# Altium PCB Led_Tree_Main .PcbDoc (part 2 of 2)
Units mm, origin at the board's own origin, x right, y up, seen from the top; angles counter-clockwise.
Board outline 150 x 150 mm, 2 copper layers (Top Layer, Bottom Layer); 89 components, 252 nets, 716 pads, 87 vias.
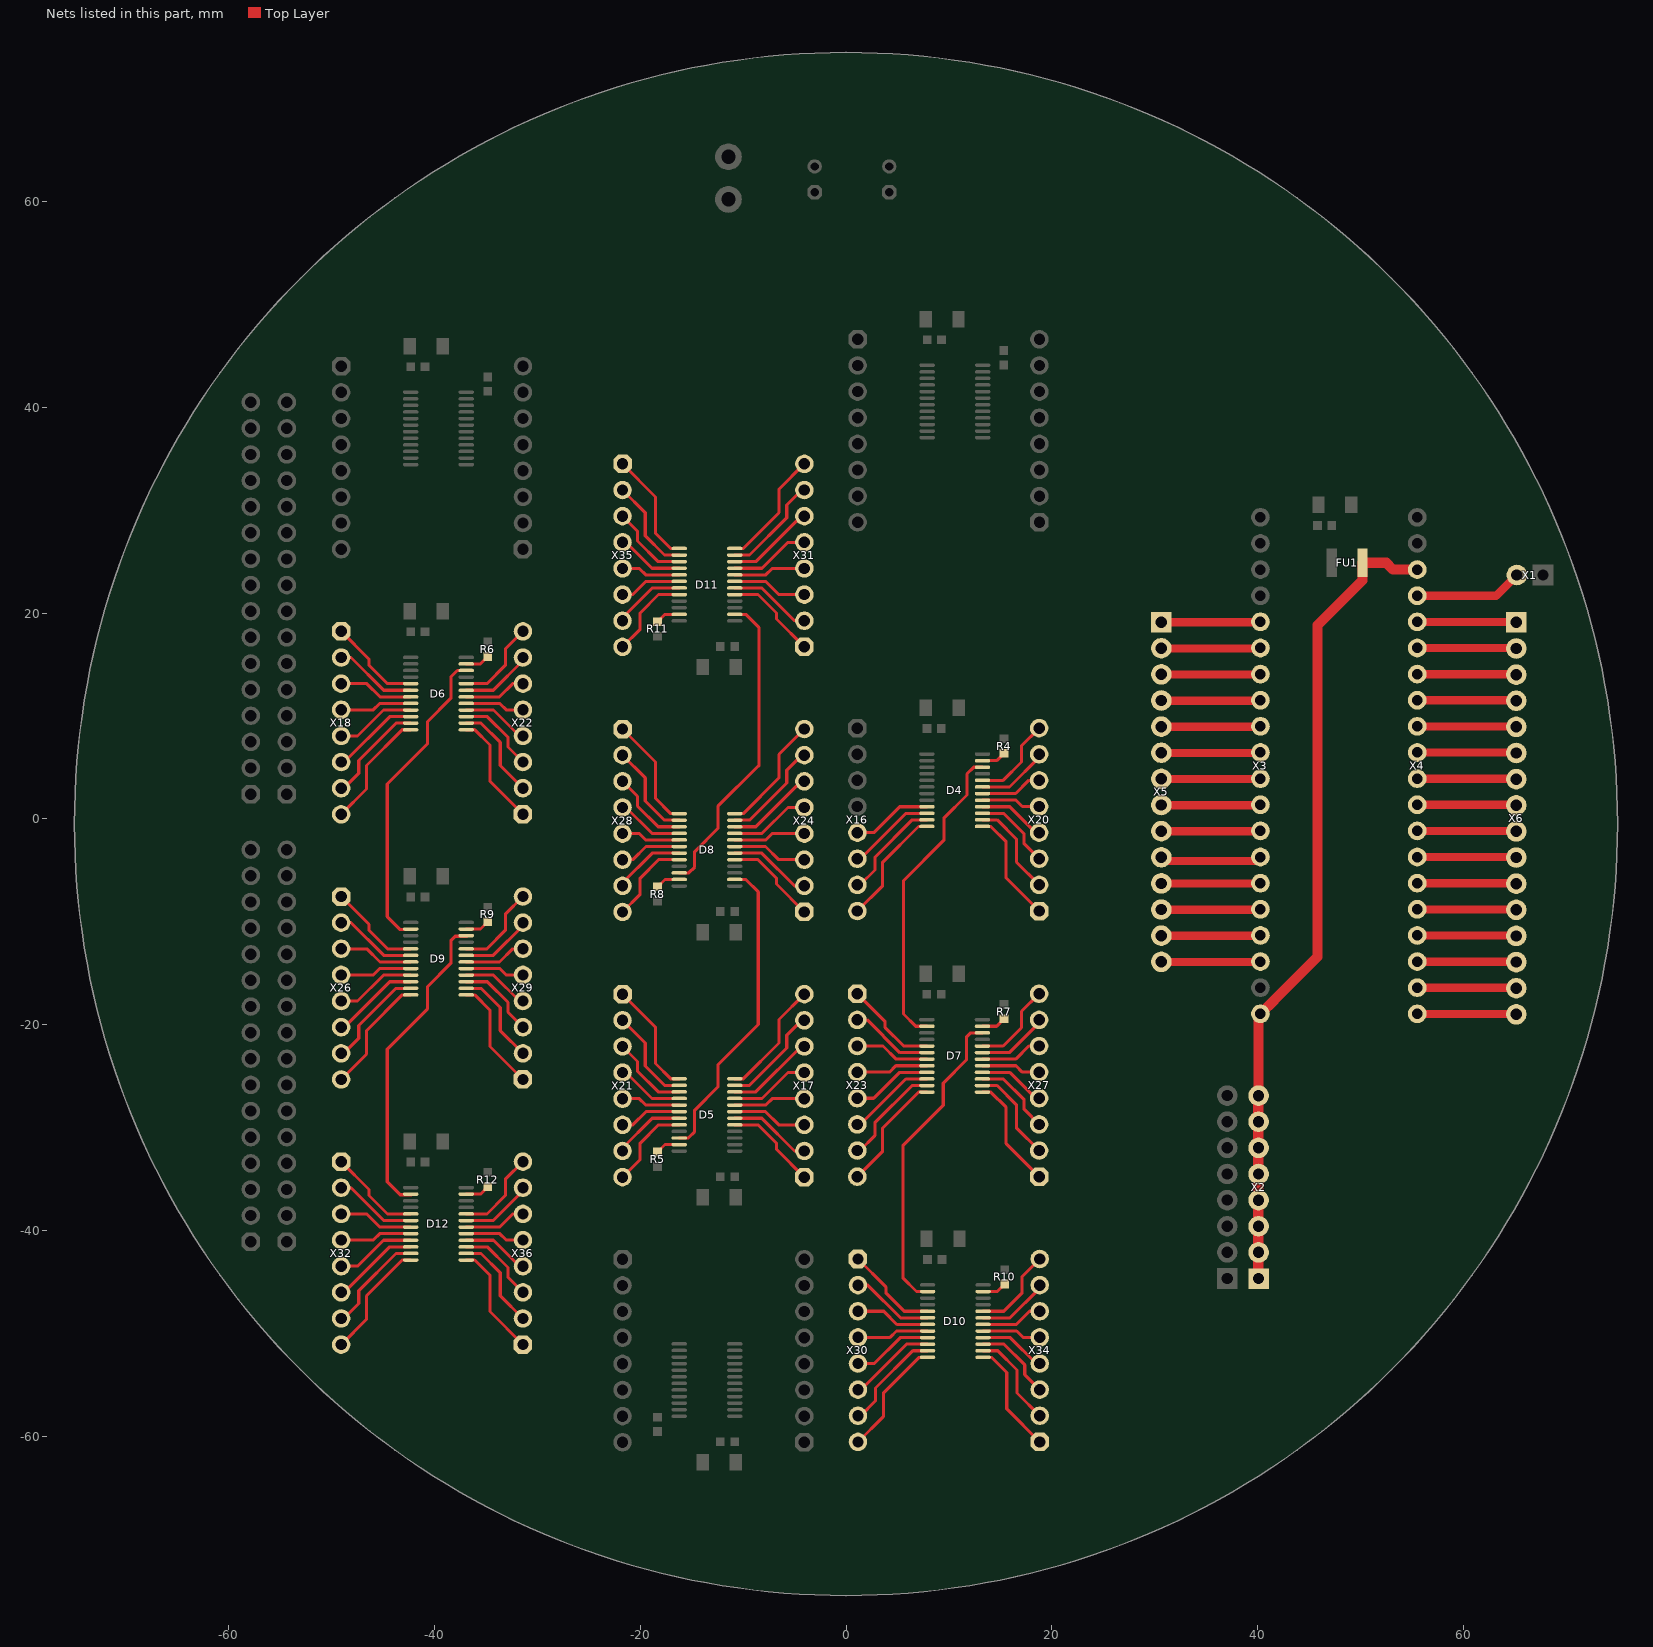
[diagram p2: the nets of this part, all layers, seen from the top]

## Via types
v1: diameter 1.27, hole 0.711, Top Layer to Bottom Layer, 82 vias
v2: diameter 5, hole 3, Top Layer to Bottom Layer, 4 vias
v3: diameter 4.68, hole 3.18, Top Layer to Bottom Layer, 1 vias

## Nets (pads, with @x,y where several pads share a name; then routed paths per layer and width w, separated by ;. In a path a pad name is that pad's centre, name@x,y a point inside that pad or via, vN(x,y) a via of type N, cw(c..) or ccw(c..) an arc to the next point about the centre after c; other vN are vias at no path point) (continued)
NetD4_9: D4.9 X16.5 | length 7.8
  Top Layer w0.3: X16.5@1.105,-1.34 2.695,-1.34 5.215,1.18 D4.9@7.865,1.18
NetD4_10: D4.10 X16.6 | length 8.3
  Top Layer w0.3: X16.6@1.405,-3.88 5.825,0.54 D4.10@7.865,0.54
NetD4_11: D4.11 X16.7 | length 9.9
  Top Layer w0.3: X16.7@1.365,-6.42 2.815,-4.97 2.815,-3.72 6.435,-0.1 D4.11@7.865,-0.1
NetD4_12: D4.12 X16.8 | length 11.5
  Top Layer w0.3: X16.8@1.105,-8.96 3.565,-6.5 3.565,-4.22 7.045,-0.74 D4.12@7.865,-0.74
NetD4_13: D4.13 X20.1 | length 11
  Top Layer w0.3: D4.13@13.265,-0.74 14.085,-0.74 15.565,-2.22 15.565,-5.75 X20.1@18.775,-8.96
NetD4_14: D4.14 X20.2 | length 9.4
  Top Layer w0.3: D4.14@13.265,-0.1 14.695,-0.1 16.565,-1.97 16.565,-4.21 X20.2@18.775,-6.42
NetD4_15: D4.15 X20.3 | length 7.9
  Top Layer w0.3: D4.15@13.265,0.54 15.305,0.54 17.315,-1.47 17.315,-2.42 X20.3@18.775,-3.88
NetD4_16: D4.16 X20.4 | length 6.2
  Top Layer w0.3: D4.16@13.265,1.18 15.915,1.18 X20.4@18.435,-1.34
NetD4_17: D4.17 X20.5 | length 5.8
  Top Layer w0.3: D4.17@13.265,1.82 16.525,1.82 17.145,1.2 X20.5@18.775,1.2
NetD4_18: D4.18 X20.6 | length 6
  Top Layer w0.3: D4.18@13.265,2.46 16.495,2.46 17.775,3.74 X20.6@18.775,3.74
NetD4_19: D4.19 X20.7 | length 6.7
  Top Layer w0.3: D4.19@13.265,3.1 15.885,3.1 X20.7@18.775,5.99
NetD4_20: D4.20 X20.8 | length 8.5
  Top Layer w0.3: D4.20@13.265,3.74 15.275,3.74 17.065,5.53 17.065,7.11 X20.8@18.775,8.82
NetD4_22: D4.22 D7.2 | length 30.4
  Top Layer w0.3: D7.2@7.86,-20.16 6.781,-20.16 5.585,-18.964 5.585,-6.01 9.515,-2.08 9.515,0.07 11.765,2.32 11.765,4.37 12.415,5.02 D4.22@13.265,5.02
NetD4_23: D4.23 R4.1 | length 2.4
  Top Layer w0.3: D4.23@13.265,5.66 14.645,5.66 R4.1@15.366,6.381
NetD5_5: D5.5 X17.1 | length 9.2
  Top Layer w0.3: D5.5@-10.81,-29.74 -8.55,-29.74 -6.76,-31.53 -6.76,-32.11 X17.1@-4.05,-34.82
NetD5_6: D5.6 X17.2 | length 8.1
  Top Layer w0.3: D5.6@-10.81,-29.1 -8.19,-29.1 -5.01,-32.28 X17.2@-4.05,-32.28
NetD5_7: D5.7 X17.3 | length 7.3
  Top Layer w0.3: D5.7@-10.81,-28.46 -7.83,-28.46 -6.55,-29.74 X17.3@-4.05,-29.74
NetD5_8: D5.8 X17.4 | length 7
  Top Layer w0.3: D5.8@-10.81,-27.82 -7.8,-27.82 -7.18,-27.2 X17.4@-4.05,-27.2
NetD5_9: D5.9 X17.5 | length 7.8
  Top Layer w0.3: D5.9@-10.81,-27.18 -8.16,-27.18 -5.64,-24.66 X17.5@-4.05,-24.66
NetD5_10: D5.10 X17.6 | length 8.3
  Top Layer w0.3: D5.10@-10.81,-26.54 -8.77,-26.54 X17.6@-4.35,-22.12
NetD5_11: D5.11 X17.7 | length 9.9
  Top Layer w0.3: D5.11@-10.81,-25.9 -9.38,-25.9 -5.76,-22.28 -5.76,-21.03 X17.7@-4.31,-19.58
NetD5_12: D5.12 X17.8 | length 11.5
  Top Layer w0.3: D5.12@-10.81,-25.26 -9.99,-25.26 -6.51,-21.78 -6.51,-19.5 X17.8@-4.05,-17.04
NetD5_13: D5.13 X21.1 | length 11
  Top Layer w0.3: X21.1@-21.72,-17.04 -18.51,-20.25 -18.51,-23.78 -17.03,-25.26 D5.13@-16.21,-25.26
NetD5_14: D5.14 X21.2 | length 9.4
  Top Layer w0.3: X21.2@-21.72,-19.58 -19.51,-21.79 -19.51,-24.03 -17.64,-25.9 D5.14@-16.21,-25.9
NetD5_15: D5.15 X21.3 | length 7.9
  Top Layer w0.3: X21.3@-21.72,-22.12 -20.26,-23.58 -20.26,-24.53 -18.25,-26.54 D5.15@-16.21,-26.54
NetD5_16: D5.16 X21.4 | length 6.2
  Top Layer w0.3: X21.4@-21.38,-24.66 -18.86,-27.18 D5.16@-16.21,-27.18
NetD5_17: D5.17 X21.5 | length 5.8
  Top Layer w0.3: X21.5@-21.72,-27.2 -20.09,-27.2 -19.47,-27.82 D5.17@-16.21,-27.82
NetD5_18: D5.18 X21.6 | length 6
  Top Layer w0.3: X21.6@-21.72,-29.74 -20.72,-29.74 -19.44,-28.46 D5.18@-16.21,-28.46
NetD5_19: D5.19 X21.7 | length 6.7
  Top Layer w0.3: X21.7@-21.72,-31.99 -18.83,-29.1 D5.19@-16.21,-29.1
NetD5_20: D5.20 X21.8 | length 8.5
  Top Layer w0.3: X21.8@-21.72,-34.82 -20.01,-33.11 -20.01,-31.53 -18.22,-29.74 D5.20@-16.21,-29.74
NetD5_22: D5.22 D8.2 | length 30.4
  Top Layer w0.3: D5.22@-16.21,-31.02 -15.327,-31.02 -14.71,-30.403 -14.71,-28.32 -12.46,-26.07 -12.46,-23.92 -8.53,-19.99 -8.53,-7.091 -9.731,-5.89 D8.2@-10.81,-5.89
NetD5_23: D5.23 R5.1 | length 2.4
  Top Layer w0.3: R5.1@-18.311,-32.381 -17.59,-31.66 D5.23@-16.21,-31.66
NetD6_5: D6.5 X18.1 | length 9.2
  Top Layer w0.3: X18.1@-49.07,18.22 -46.36,15.51 -46.36,14.93 -44.57,13.14 D6.5@-42.31,13.14
NetD6_6: D6.6 X18.2 | length 8.1
  Top Layer w0.3: X18.2@-49.07,15.68 -48.11,15.68 -44.93,12.5 D6.6@-42.31,12.5
NetD6_7: D6.7 X18.3 | length 7.3
  Top Layer w0.3: X18.3@-49.07,13.14 -46.57,13.14 -45.29,11.86 D6.7@-42.31,11.86
NetD6_8: D6.8 X18.4 | length 7
  Top Layer w0.3: X18.4@-49.07,10.6 -45.94,10.6 -45.32,11.22 D6.8@-42.31,11.22
NetD6_9: D6.9 X18.5 | length 7.8
  Top Layer w0.3: X18.5@-49.07,8.06 -47.48,8.06 -44.96,10.58 D6.9@-42.31,10.58
NetD6_10: D6.10 X18.6 | length 8.3
  Top Layer w0.3: X18.6@-48.77,5.52 -44.35,9.94 D6.10@-42.31,9.94
NetD6_11: D6.11 X18.7 | length 9.9
  Top Layer w0.3: X18.7@-48.81,2.98 -47.36,4.43 -47.36,5.68 -43.74,9.3 D6.11@-42.31,9.3
NetD6_12: D6.12 X18.8 | length 11.5
  Top Layer w0.3: X18.8@-49.07,0.44 -46.61,2.9 -46.61,5.18 -43.13,8.66 D6.12@-42.31,8.66
NetD6_13: D6.13 X22.1 | length 11
  Top Layer w0.3: D6.13@-36.91,8.66 -36.09,8.66 -34.61,7.18 -34.61,3.65 X22.1@-31.4,0.44
NetD6_14: D6.14 X22.2 | length 9.4
  Top Layer w0.3: D6.14@-36.91,9.3 -35.48,9.3 -33.61,7.43 -33.61,5.19 X22.2@-31.4,2.98
NetD6_15: D6.15 X22.3 | length 7.9
  Top Layer w0.3: D6.15@-36.91,9.94 -34.87,9.94 -32.86,7.93 -32.86,6.98 X22.3@-31.4,5.52
NetD6_16: D6.16 X22.4 | length 6.2
  Top Layer w0.3: D6.16@-36.91,10.58 -34.26,10.58 X22.4@-31.74,8.06
NetD6_17: D6.17 X22.5 | length 5.8
  Top Layer w0.3: D6.17@-36.91,11.22 -33.65,11.22 -33.03,10.6 X22.5@-31.4,10.6
NetD6_18: D6.18 X22.6 | length 6
  Top Layer w0.3: D6.18@-36.91,11.86 -33.68,11.86 -32.4,13.14 X22.6@-31.4,13.14
NetD6_19: D6.19 X22.7 | length 6.7
  Top Layer w0.3: D6.19@-36.91,12.5 -34.29,12.5 X22.7@-31.4,15.39
NetD6_20: D6.20 X22.8 | length 8.5
  Top Layer w0.3: D6.20@-36.91,13.14 -34.9,13.14 -33.11,14.93 -33.11,16.51 X22.8@-31.4,18.22
NetD6_22: D6.22 D9.2 | length 30.5
  Top Layer w0.3: D9.2@-42.25,-10.77 -43.329,-10.77 -44.59,-9.509 -44.59,3.39 -40.66,7.32 -40.66,9.47 -38.41,11.72 -38.41,13.791 -37.781,14.42 D6.22@-36.91,14.42
NetD6_23: D6.23 R6.1 | length 2.4
  Top Layer w0.3: D6.23@-36.91,15.06 -35.53,15.06 R6.1@-34.809,15.781
NetD7_5: D7.5 X23.1 | length 9.2
  Top Layer w0.3: X23.1@1.1,-17 3.81,-19.71 3.81,-20.29 5.6,-22.08 D7.5@7.86,-22.08
NetD7_6: D7.6 X23.2 | length 8.1
  Top Layer w0.3: X23.2@1.1,-19.54 2.06,-19.54 5.24,-22.72 D7.6@7.86,-22.72
NetD7_7: D7.7 X23.3 | length 7.3
  Top Layer w0.3: X23.3@1.1,-22.08 3.6,-22.08 4.88,-23.36 D7.7@7.86,-23.36
NetD7_8: D7.8 X23.4 | length 7
  Top Layer w0.3: X23.4@1.1,-24.62 4.23,-24.62 4.85,-24 D7.8@7.86,-24
NetD7_9: D7.9 X23.5 | length 7.8
  Top Layer w0.3: X23.5@1.1,-27.16 2.69,-27.16 5.21,-24.64 D7.9@7.86,-24.64
NetD7_10: D7.10 X23.6 | length 8.3
  Top Layer w0.3: X23.6@1.4,-29.7 5.82,-25.28 D7.10@7.86,-25.28
NetD7_11: D7.11 X23.7 | length 9.9
  Top Layer w0.3: X23.7@1.36,-32.24 2.81,-30.79 2.81,-29.54 6.43,-25.92 D7.11@7.86,-25.92
NetD7_12: D7.12 X23.8 | length 11.5
  Top Layer w0.3: X23.8@1.1,-34.78 3.56,-32.32 3.56,-30.04 7.04,-26.56 D7.12@7.86,-26.56
NetD7_13: D7.13 X27.1 | length 11
  Top Layer w0.3: D7.13@13.26,-26.56 14.08,-26.56 15.56,-28.04 15.56,-31.57 X27.1@18.77,-34.78
NetD7_14: D7.14 X27.2 | length 9.4
  Top Layer w0.3: D7.14@13.26,-25.92 14.69,-25.92 16.56,-27.79 16.56,-30.03 X27.2@18.77,-32.24
NetD7_15: D7.15 X27.3 | length 7.9
  Top Layer w0.3: D7.15@13.26,-25.28 15.3,-25.28 17.31,-27.29 17.31,-28.24 X27.3@18.77,-29.7
NetD7_16: D7.16 X27.4 | length 6.2
  Top Layer w0.3: D7.16@13.26,-24.64 15.91,-24.64 X27.4@18.43,-27.16
NetD7_17: D7.17 X27.5 | length 5.8
  Top Layer w0.3: D7.17@13.26,-24 16.52,-24 17.14,-24.62 X27.5@18.77,-24.62
NetD7_18: D7.18 X27.6 | length 6
  Top Layer w0.3: D7.18@13.26,-23.36 16.49,-23.36 17.77,-22.08 X27.6@18.77,-22.08
NetD7_19: D7.19 X27.7 | length 6.7
  Top Layer w0.3: D7.19@13.26,-22.72 15.88,-22.72 X27.7@18.77,-19.83
NetD7_20: D7.20 X27.8 | length 8.5
  Top Layer w0.3: D7.20@13.26,-22.08 15.27,-22.08 17.06,-20.29 17.06,-18.71 X27.8@18.77,-17
NetD7_22: D7.22 D10.2 | length 30.6
  Top Layer w0.3: D10.2@7.925,-45.94 6.846,-45.94 5.52,-44.614 5.52,-31.77 9.45,-27.84 9.45,-25.69 11.7,-23.44 11.7,-21.225 12.125,-20.8 D7.22@13.26,-20.8
NetD7_23: D7.23 R7.1 | length 2.4
  Top Layer w0.3: D7.23@13.26,-20.16 14.64,-20.16 R7.1@15.361,-19.439
NetD8_5: D8.5 X24.1 | length 9.2
  Top Layer w0.3: D8.5@-10.81,-3.97 -8.55,-3.97 -6.76,-5.76 -6.76,-6.34 X24.1@-4.05,-9.05
NetD8_6: D8.6 X24.2 | length 8.1
  Top Layer w0.3: D8.6@-10.81,-3.33 -8.19,-3.33 -5.01,-6.51 X24.2@-4.05,-6.51
NetD8_7: D8.7 X24.3 | length 7.3
  Top Layer w0.3: D8.7@-10.81,-2.69 -7.83,-2.69 -6.55,-3.97 X24.3@-4.05,-3.97
NetD8_8: D8.8 X24.4 | length 7
  Top Layer w0.3: D8.8@-10.81,-2.05 -7.8,-2.05 -7.18,-1.43 X24.4@-4.05,-1.43
NetD8_9: D8.9 X24.5 | length 7.8
  Top Layer w0.3: D8.9@-10.81,-1.41 -8.16,-1.41 -5.64,1.11 X24.5@-4.05,1.11
NetD8_10: D8.10 X24.6 | length 8.3
  Top Layer w0.3: D8.10@-10.81,-0.77 -8.77,-0.77 X24.6@-4.35,3.65
NetD8_11: D8.11 X24.7 | length 9.9
  Top Layer w0.3: D8.11@-10.81,-0.13 -9.38,-0.13 -5.76,3.49 -5.76,4.74 X24.7@-4.31,6.19
NetD8_12: D8.12 X24.8 | length 11.5
  Top Layer w0.3: D8.12@-10.81,0.51 -9.99,0.51 -6.51,3.99 -6.51,6.27 X24.8@-4.05,8.73
NetD8_13: D8.13 X28.1 | length 11
  Top Layer w0.3: X28.1@-21.72,8.73 -18.51,5.52 -18.51,1.99 -17.03,0.51 D8.13@-16.21,0.51
NetD8_14: D8.14 X28.2 | length 9.4
  Top Layer w0.3: X28.2@-21.72,6.19 -19.51,3.98 -19.51,1.74 -17.64,-0.13 D8.14@-16.21,-0.13
NetD8_15: D8.15 X28.3 | length 7.9
  Top Layer w0.3: X28.3@-21.72,3.65 -20.26,2.19 -20.26,1.24 -18.25,-0.77 D8.15@-16.21,-0.77
NetD8_16: D8.16 X28.4 | length 6.2
  Top Layer w0.3: X28.4@-21.38,1.11 -18.86,-1.41 D8.16@-16.21,-1.41
NetD8_17: D8.17 X28.5 | length 5.8
  Top Layer w0.3: X28.5@-21.72,-1.43 -20.09,-1.43 -19.47,-2.05 D8.17@-16.21,-2.05
NetD8_18: D8.18 X28.6 | length 6
  Top Layer w0.3: X28.6@-21.72,-3.97 -20.72,-3.97 -19.44,-2.69 D8.18@-16.21,-2.69
NetD8_19: D8.19 X28.7 | length 6.7
  Top Layer w0.3: X28.7@-21.72,-6.22 -18.83,-3.33 D8.19@-16.21,-3.33
NetD8_20: D8.20 X28.8 | length 8.5
  Top Layer w0.3: X28.8@-21.72,-9.05 -20.01,-7.34 -20.01,-5.76 -18.22,-3.97 D8.20@-16.21,-3.97
NetD8_22: D8.22 D11.2 | length 30.5
  Top Layer w0.3: D8.22@-16.21,-5.25 -15.27,-5.25 -14.71,-4.69 -14.71,-3.19 -12.46,-0.94 -12.46,1.21 -8.53,5.14 ; D11.2@-10.81,19.88 -9.731,19.88 -8.47,18.619 -8.47,5.14
NetD8_23: D8.23 R8.1 | length 2.4
  Top Layer w0.3: R8.1@-18.311,-6.611 -17.59,-5.89 D8.23@-16.21,-5.89
NetD9_5: D9.5 X26.1 | length 9.2
  Top Layer w0.3: X26.1@-49.07,-7.55 -46.36,-10.26 -46.36,-10.84 -44.57,-12.63 D9.5@-42.31,-12.63
NetD9_6: D9.6 X26.2 | length 8.1
  Top Layer w0.3: X26.2@-49.07,-10.09 -48.11,-10.09 -44.93,-13.27 D9.6@-42.31,-13.27
NetD9_7: D9.7 X26.3 | length 7.3
  Top Layer w0.3: X26.3@-49.07,-12.63 -46.57,-12.63 -45.29,-13.91 D9.7@-42.31,-13.91
NetD9_8: D9.8 X26.4 | length 7
  Top Layer w0.3: X26.4@-49.07,-15.17 -45.94,-15.17 -45.32,-14.55 D9.8@-42.31,-14.55
NetD9_9: D9.9 X26.5 | length 7.8
  Top Layer w0.3: X26.5@-49.07,-17.71 -47.48,-17.71 -44.96,-15.19 D9.9@-42.31,-15.19
NetD9_10: D9.10 X26.6 | length 8.3
  Top Layer w0.3: X26.6@-48.77,-20.25 -44.35,-15.83 D9.10@-42.31,-15.83
NetD9_11: D9.11 X26.7 | length 9.9
  Top Layer w0.3: X26.7@-48.81,-22.79 -47.36,-21.34 -47.36,-20.09 -43.74,-16.47 D9.11@-42.31,-16.47
NetD9_12: D9.12 X26.8 | length 11.5
  Top Layer w0.3: X26.8@-49.07,-25.33 -46.61,-22.87 -46.61,-20.59 -43.13,-17.11 D9.12@-42.31,-17.11
NetD9_13: D9.13 X29.1 | length 11
  Top Layer w0.3: D9.13@-36.91,-17.11 -36.09,-17.11 -34.61,-18.59 -34.61,-22.12 X29.1@-31.4,-25.33
NetD9_14: D9.14 X29.2 | length 9.4
  Top Layer w0.3: D9.14@-36.91,-16.47 -35.48,-16.47 -33.61,-18.34 -33.61,-20.58 X29.2@-31.4,-22.79
NetD9_15: D9.15 X29.3 | length 7.9
  Top Layer w0.3: D9.15@-36.91,-15.83 -34.87,-15.83 -32.86,-17.84 -32.86,-18.79 X29.3@-31.4,-20.25
NetD9_16: D9.16 X29.4 | length 6.2
  Top Layer w0.3: D9.16@-36.91,-15.19 -34.26,-15.19 X29.4@-31.74,-17.71
NetD9_17: D9.17 X29.5 | length 5.8
  Top Layer w0.3: D9.17@-36.91,-14.55 -33.65,-14.55 -33.03,-15.17 X29.5@-31.4,-15.17
NetD9_18: D9.18 X29.6 | length 6
  Top Layer w0.3: D9.18@-36.91,-13.91 -33.68,-13.91 -32.4,-12.63 X29.6@-31.4,-12.63
NetD9_19: D9.19 X29.7 | length 6.7
  Top Layer w0.3: D9.19@-36.91,-13.27 -34.29,-13.27 X29.7@-31.4,-10.38
NetD9_20: D9.20 X29.8 | length 8.5
  Top Layer w0.3: D9.20@-36.91,-12.63 -34.9,-12.63 -33.11,-10.84 -33.11,-9.26 X29.8@-31.4,-7.55
NetD9_22: D9.22 D12.2 | length 30.6
  Top Layer w0.3: D12.2@-42.25,-36.54 -43.329,-36.54 -44.59,-35.279 -44.59,-22.38 -40.66,-18.45 -40.66,-16.3 -38.41,-14.05 -38.41,-11.835 -37.985,-11.41 D9.22@-36.85,-11.41
NetD9_23: D9.23 R9.1 | length 2.4
  Top Layer w0.3: D9.23@-36.91,-10.71 -35.53,-10.71 R9.1@-34.809,-9.989
NetD10_5: D10.5 X30.1 | length 9.2
  Top Layer w0.3: X30.1@1.165,-42.78 3.875,-45.49 3.875,-46.07 5.665,-47.86 D10.5@7.925,-47.86
NetD10_6: D10.6 X30.2 | length 8.1
  Top Layer w0.3: X30.2@1.165,-45.32 2.125,-45.32 5.305,-48.5 D10.6@7.925,-48.5
NetD10_7: D10.7 X30.3 | length 7.3
  Top Layer w0.3: X30.3@1.165,-47.86 3.665,-47.86 4.945,-49.14 D10.7@7.925,-49.14
NetD10_8: D10.8 X30.4 | length 7
  Top Layer w0.3: X30.4@1.165,-50.4 4.295,-50.4 4.915,-49.78 D10.8@7.925,-49.78
NetD10_9: D10.9 X30.5 | length 7.8
  Top Layer w0.3: X30.5@1.165,-52.94 2.755,-52.94 5.275,-50.42 D10.9@7.925,-50.42
NetD10_10: D10.10 X30.6 | length 8.3
  Top Layer w0.3: X30.6@1.465,-55.48 5.885,-51.06 D10.10@7.925,-51.06
NetD10_11: D10.11 X30.7 | length 9.9
  Top Layer w0.3: X30.7@1.425,-58.02 2.875,-56.57 2.875,-55.32 6.495,-51.7 D10.11@7.925,-51.7
NetD10_12: D10.12 X30.8 | length 11.5
  Top Layer w0.3: X30.8@1.165,-60.56 3.625,-58.1 3.625,-55.82 7.105,-52.34 D10.12@7.925,-52.34
NetD10_13: D10.13 X34.1 | length 11
  Top Layer w0.3: D10.13@13.325,-52.34 14.145,-52.34 15.625,-53.82 15.625,-57.35 X34.1@18.835,-60.56
NetD10_14: D10.14 X34.2 | length 9.4
  Top Layer w0.3: D10.14@13.325,-51.7 14.755,-51.7 16.625,-53.57 16.625,-55.81 X34.2@18.835,-58.02
NetD10_15: D10.15 X34.3 | length 7.9
  Top Layer w0.3: D10.15@13.325,-51.06 15.365,-51.06 17.375,-53.07 17.375,-54.02 X34.3@18.835,-55.48
NetD10_16: D10.16 X34.4 | length 6.2
  Top Layer w0.3: D10.16@13.325,-50.42 15.975,-50.42 X34.4@18.495,-52.94
NetD10_17: D10.17 X34.5 | length 5.8
  Top Layer w0.3: D10.17@13.325,-49.78 16.585,-49.78 17.205,-50.4 X34.5@18.835,-50.4
NetD10_18: D10.18 X34.6 | length 6
  Top Layer w0.3: D10.18@13.325,-49.14 16.555,-49.14 17.835,-47.86 X34.6@18.835,-47.86
NetD10_19: D10.19 X34.7 | length 6.7
  Top Layer w0.3: D10.19@13.325,-48.5 15.945,-48.5 X34.7@18.835,-45.61
NetD10_20: D10.20 X34.8 | length 8.5
  Top Layer w0.3: D10.20@13.325,-47.86 15.335,-47.86 17.125,-46.07 17.125,-44.49 X34.8@18.835,-42.78
NetD10_23: D10.23 R10.1 | length 2.4
  Top Layer w0.3: D10.23@13.325,-45.94 14.705,-45.94 R10.1@15.426,-45.219
NetD11_5: D11.5 X31.1 | length 9.2
  Top Layer w0.3: D11.5@-10.81,21.8 -8.55,21.8 -6.76,20.01 -6.76,19.43 X31.1@-4.05,16.72
NetD11_6: D11.6 X31.2 | length 8.1
  Top Layer w0.3: D11.6@-10.81,22.44 -8.19,22.44 -5.01,19.26 X31.2@-4.05,19.26
NetD11_7: D11.7 X31.3 | length 7.3
  Top Layer w0.3: D11.7@-10.81,23.08 -7.83,23.08 -6.55,21.8 X31.3@-4.05,21.8
NetD11_8: D11.8 X31.4 | length 7
  Top Layer w0.3: D11.8@-10.81,23.72 -7.8,23.72 -7.18,24.34 X31.4@-4.05,24.34
NetD11_9: D11.9 X31.5 | length 7.8
  Top Layer w0.3: D11.9@-10.81,24.36 -8.16,24.36 -5.64,26.88 X31.5@-4.05,26.88
NetD11_10: D11.10 X31.6 | length 8.3
  Top Layer w0.3: D11.10@-10.81,25 -8.77,25 X31.6@-4.35,29.42
NetD11_11: D11.11 X31.7 | length 9.9
  Top Layer w0.3: D11.11@-10.81,25.64 -9.38,25.64 -5.76,29.26 -5.76,30.51 X31.7@-4.31,31.96
NetD11_12: D11.12 X31.8 | length 11.5
  Top Layer w0.3: D11.12@-10.81,26.28 -9.99,26.28 -6.51,29.76 -6.51,32.04 X31.8@-4.05,34.5
NetD11_13: D11.13 X35.1 | length 11
  Top Layer w0.3: X35.1@-21.72,34.5 -18.51,31.29 -18.51,27.76 -17.03,26.28 D11.13@-16.21,26.28
NetD11_14: D11.14 X35.2 | length 9.4
  Top Layer w0.3: X35.2@-21.72,31.96 -19.51,29.75 -19.51,27.51 -17.64,25.64 D11.14@-16.21,25.64
NetD11_15: D11.15 X35.3 | length 7.9
  Top Layer w0.3: X35.3@-21.72,29.42 -20.26,27.96 -20.26,27.01 -18.25,25 D11.15@-16.21,25
NetD11_16: D11.16 X35.4 | length 6.2
  Top Layer w0.3: X35.4@-21.38,26.88 -18.86,24.36 D11.16@-16.21,24.36
NetD11_17: D11.17 X35.5 | length 5.8
  Top Layer w0.3: X35.5@-21.72,24.34 -20.09,24.34 -19.47,23.72 D11.17@-16.21,23.72
NetD11_18: D11.18 X35.6 | length 6
  Top Layer w0.3: X35.6@-21.72,21.8 -20.72,21.8 -19.44,23.08 D11.18@-16.21,23.08
NetD11_19: D11.19 X35.7 | length 6.7
  Top Layer w0.3: X35.7@-21.72,19.55 -18.83,22.44 D11.19@-16.21,22.44
NetD11_20: D11.20 X35.8 | length 8.5
  Top Layer w0.3: X35.8@-21.72,16.72 -20.01,18.43 -20.01,20.01 -18.22,21.8 D11.20@-16.21,21.8
NetD11_23: D11.23 R11.1 | length 2.4
  Top Layer w0.3: R11.1@-18.311,19.159 -17.59,19.88 D11.23@-16.21,19.88
NetD12_5: D12.5 X32.1 | length 9.2
  Top Layer w0.3: X32.1@-49.07,-33.32 -46.36,-36.03 -46.36,-36.61 -44.57,-38.4 D12.5@-42.31,-38.4
NetD12_6: D12.6 X32.2 | length 8.1
  Top Layer w0.3: X32.2@-49.07,-35.86 -48.11,-35.86 -44.93,-39.04 D12.6@-42.31,-39.04
NetD12_7: D12.7 X32.3 | length 7.3
  Top Layer w0.3: X32.3@-49.07,-38.4 -46.57,-38.4 -45.29,-39.68 D12.7@-42.31,-39.68
NetD12_8: D12.8 X32.4 | length 7
  Top Layer w0.3: X32.4@-49.07,-40.94 -45.94,-40.94 -45.32,-40.32 D12.8@-42.31,-40.32
NetD12_9: D12.9 X32.5 | length 7.8
  Top Layer w0.3: X32.5@-49.07,-43.48 -47.48,-43.48 -44.96,-40.96 D12.9@-42.31,-40.96
NetD12_10: D12.10 X32.6 | length 8.3
  Top Layer w0.3: X32.6@-48.77,-46.02 -44.35,-41.6 D12.10@-42.31,-41.6
NetD12_11: D12.11 X32.7 | length 9.9
  Top Layer w0.3: X32.7@-48.81,-48.56 -47.36,-47.11 -47.36,-45.86 -43.74,-42.24 D12.11@-42.31,-42.24
NetD12_12: D12.12 X32.8 | length 11.5
  Top Layer w0.3: X32.8@-49.07,-51.1 -46.61,-48.64 -46.61,-46.36 -43.13,-42.88 D12.12@-42.31,-42.88
NetD12_13: D12.13 X36.1 | length 11
  Top Layer w0.3: D12.13@-36.91,-42.88 -36.09,-42.88 -34.61,-44.36 -34.61,-47.89 X36.1@-31.4,-51.1
NetD12_14: D12.14 X36.2 | length 9.4
  Top Layer w0.3: D12.14@-36.91,-42.24 -35.48,-42.24 -33.61,-44.11 -33.61,-46.35 X36.2@-31.4,-48.56
NetD12_15: D12.15 X36.3 | length 7.9
  Top Layer w0.3: D12.15@-36.91,-41.6 -34.87,-41.6 -32.86,-43.61 -32.86,-44.56 X36.3@-31.4,-46.02
NetD12_16: D12.16 X36.4 | length 6.2
  Top Layer w0.3: D12.16@-36.91,-40.96 -34.26,-40.96 X36.4@-31.74,-43.48
NetD12_17: D12.17 X36.5 | length 5.8
  Top Layer w0.3: D12.17@-36.91,-40.32 -33.65,-40.32 -33.03,-40.94 X36.5@-31.4,-40.94
NetD12_18: D12.18 X36.6 | length 6
  Top Layer w0.3: D12.18@-36.91,-39.68 -33.68,-39.68 -32.4,-38.4 X36.6@-31.4,-38.4
NetD12_19: D12.19 X36.7 | length 6.7
  Top Layer w0.3: D12.19@-36.91,-39.04 -34.29,-39.04 X36.7@-31.4,-36.15
NetD12_20: D12.20 X36.8 | length 8.5
  Top Layer w0.3: D12.20@-36.91,-38.4 -34.9,-38.4 -33.11,-36.61 -33.11,-35.03 X36.8@-31.4,-33.32
NetD12_23: D12.23 R12.1 | length 2.4
  Top Layer w0.3: D12.23@-36.91,-36.48 -35.53,-36.48 R12.1@-34.809,-35.759
NetFU1_2: FU1.2 X2.1 X2.2 X2.3 X2.4 X2.5 X2.6 X2.7 X2.8 X3.20 X4.3 | length 79.9
  Top Layer w0.8: X2.8@40.15,-27.085 X2.8@40.15,-26.9
  Top Layer w1: X2.8@39.885,-26.735 X2.8@39.885,-26.635 ; X2.1@40.06,-44.775 40.06,-42.14 40.06,-37.06 40.06,-29.44 X2.8@40.06,-26.995 ; X2.8@40.15,-26.9 X2.8@39.885,-26.635 ; 41.677,-17.558 45.825,-13.41 45.825,18.825 50.2,23.2 FU1.2@50.2,24.9 52.5,24.9 53.17,24.23 X4.3@55.525,24.23 ; 41.683,-17.564 41.671,-17.564 X3.20@40.285,-18.95 40.1,-19.135 40.1,-26.42 X2.8@39.885,-26.635
NetX1_2: X1.2 X4.4 | length 10.5
  Top Layer w0.8: X4.4@55.525,21.69 63.19,21.69 ; 63.19,21.68 X1.2@65.21,23.7
NetX3_5: X3.5 X5.1 | length 9.7
  Top Layer w0.8: X5.1@30.65,19.11 40.245,19.11 X3.5@40.285,19.15
NetX3_6: X3.6 X5.2 | length 9.7
  Top Layer w0.8: X5.2@30.65,16.57 40.245,16.57 X3.6@40.285,16.61
NetX3_7: X3.7 X5.3 | length 9.7
  Top Layer w0.8: X5.3@30.65,14.03 40.245,14.03 X3.7@40.285,14.07
NetX3_8: X3.8 X5.4 | length 9.7
  Top Layer w0.8: X5.4@30.65,11.49 40.245,11.49 X3.8@40.285,11.53
NetX3_9: X3.9 X5.5 | length 9.7
  Top Layer w0.8: X5.5@30.65,8.95 40.245,8.95 X3.9@40.285,8.99
NetX3_10: X3.10 X5.6 | length 9.7
  Top Layer w0.8: X5.6@30.65,6.41 40.245,6.41 X3.10@40.285,6.45
NetX3_11: X3.11 X5.7 | length 9.7
  Top Layer w0.8: X5.7@30.65,3.87 40.245,3.87 X3.11@40.285,3.91
NetX3_12: X3.12 X5.8 | length 9.7
  Top Layer w0.8: X5.8@30.65,1.33 40.245,1.33 X3.12@40.285,1.37
NetX3_13: X3.13 X5.9 | length 9.7
  Top Layer w0.8: X5.9@30.65,-1.21 40.245,-1.21 X3.13@40.285,-1.17
NetX3_14: X3.14 X5.10 | length 9.9
  Top Layer w0.8: X5.10@30.65,-3.75 31,-4.1 39.895,-4.1 X3.14@40.285,-3.71
NetX3_15: X3.15 X5.11 | length 9.7
  Top Layer w0.8: X5.11@30.65,-6.29 40.245,-6.29 X3.15@40.285,-6.25
NetX3_16: X3.16 X5.12 | length 9.7
  Top Layer w0.8: X5.12@30.65,-8.83 40.245,-8.83 X3.16@40.285,-8.79
NetX3_17: X3.17 X5.13 | length 9.7
  Top Layer w0.8: X5.13@30.65,-11.37 40.245,-11.37 X3.17@40.285,-11.33
NetX3_18: X3.18 X5.14 | length 9.7
  Top Layer w0.8: X5.14@30.65,-13.91 40.245,-13.91 X3.18@40.285,-13.87
NetX4_5: X4.5 X6.1 | length 9.6
  Top Layer w0.8: X4.5@55.525,19.14 65.11,19.14 X6.1@65.15,19.1
NetX4_6: X4.6 X6.2 | length 9.6
  Top Layer w0.8: X4.6@55.525,16.6 65.11,16.6 X6.2@65.15,16.56
NetX4_7: X4.7 X6.3 | length 9.6
  Top Layer w0.8: X4.7@55.525,14.06 65.11,14.06 X6.3@65.15,14.02
NetX4_8: X4.8 X6.4 | length 9.6
  Top Layer w0.8: X4.8@55.525,11.52 65.11,11.52 X6.4@65.15,11.48
NetX4_9: X4.9 X6.5 | length 9.6
  Top Layer w0.8: X4.9@55.525,8.98 65.11,8.98 X6.5@65.15,8.94
NetX4_10: X4.10 X6.6 | length 9.7
  Top Layer w0.8: X4.10@55.475,6.44 65.11,6.44 X6.6@65.15,6.4
NetX4_11: X4.11 X6.7 | length 9.6
  Top Layer w0.8: X4.11@55.525,3.9 65.11,3.9 X6.7@65.15,3.86
NetX4_12: X4.12 X6.8 | length 9.6
  Top Layer w0.8: X4.12@55.525,1.36 65.11,1.36 X6.8@65.15,1.32
NetX4_13: X4.13 X6.9 | length 9.6
  Top Layer w0.8: X4.13@55.525,-1.18 65.11,-1.18 X6.9@65.15,-1.22
NetX4_14: X4.14 X6.10 | length 9.6
  Top Layer w0.8: X4.14@55.525,-3.72 65.11,-3.72 X6.10@65.15,-3.76
NetX4_15: X4.15 X6.11 | length 9.6
  Top Layer w0.8: X4.15@55.525,-6.26 65.11,-6.26 X6.11@65.15,-6.3
NetX4_16: X4.16 X6.12 | length 9.7
  Top Layer w0.8: X4.16@55.5,-8.8 65.11,-8.8 X6.12@65.15,-8.84
NetX4_17: X4.17 X6.13 | length 9.6
  Top Layer w0.8: X4.17@55.525,-11.34 65.11,-11.34 X6.13@65.15,-11.38
NetX4_18: X4.18 X6.14 | length 9.6
  Top Layer w0.8: X4.18@55.525,-13.88 65.11,-13.88 X6.14@65.15,-13.92
NetX4_19: X4.19 X6.15 | length 9.6
  Top Layer w0.8: X4.19@55.525,-16.42 65.11,-16.42 X6.15@65.15,-16.46
NetX4_20: X4.20 X6.16 | length 9.6
  Top Layer w0.8: X4.20@55.525,-18.96 65.11,-18.96 X6.16@65.15,-19
pads on no net: D1.21 D2.21 D3.21 D4.21 D5.21 D6.21 D7.21 D8.21 D9.21 D10.21 D11.21 D12.21 D12.22
copper on no net:
  other v2: -28.9,-58 28.9,-58 -28.9,58 28.9,58
  other v3: -11.425,68.55

## Polygon pours and split planes (outlines as drawn)
GND on Bottom Layer "GND" (solid, remove dead copper, pour order 24): 35,-75.5 -75,-75.5 -75,66 35,66
GND on Bottom Layer "Bottom Layer-No Net" (solid, pour order 22): 8,70.5 8,58 16.1,58 16.1,70.5
NetC1_1 on Top Layer "VCC" (solid, remove dead copper, pour order 26): 35,-75.5 -75,-75.5 -75,66 35,66
NetC1_1 on Top Layer "Bottom Layer-No Net" (solid, pour order 18): 4,62.4 7,62.4 9.6,59.8 9.6,57.9 4,57.9

## Keep-outs
Keep-Out Layer:
  circle w0.2: c0,-0.5 r75

## Other copper
Top Layer:
  rectangle net GND: 8.075,62.67 16.075,70.35

## Silkscreen, mask and mechanical layers (free items; w line width, h text height)
Top Overlay:
  lines w0.1: -60.3,-23.6 -60.3,-42.7 -59.8,-42.7 ; -60.3,-20.5 -60.3,-1.4 -59.8,-1.4 ; -60.3,19.9 -60.3,0.8 -59.8,0.8 ; -60.3,23 -60.3,42.1 -59.8,42.1 ; -52.4,-42.7 -51.9,-42.7 -51.9,-23.6 ; -52.4,-1.4 -51.9,-1.4 -51.9,-20.5 ; -52.4,0.8 -51.9,0.8 -51.9,19.9 ; -52.4,42.1 -51.9,42.1 -51.9,23 ; 24.85,-12.625 25.05,-12.625 30.015,-12.625 ; 24.85,-12.475 24.85,-10.075 ; 24.85,-12.425 24.85,-15.075 24.94,-15.165 30.015,-15.165 ; 24.85,-2.475 24.85,-7.545 ; 24.85,17.855 29.38,17.855 ; 24.865,10.235 30.015,10.235 ; 24.9,0.075 30.015,0.075 ; 26.85,-7.545 26.85,-2.465 ; 26.85,-5.005 30.015,-5.005 ; 26.85,12.775 26.85,17.855 ; 26.85,15.315 30.015,15.315 ; 29.38,20.395 24.92,20.395 24.85,20.325 24.85,12.775 ; 30.015,-10.085 24.86,-10.085 24.85,-10.075 ; 30.015,-7.545 24.85,-7.545 ; 30.015,-2.465 24.86,-2.465 24.85,-2.455 24.85,0.125 24.85,2.615 ; 30.015,2.615 24.85,2.615 ; 30.015,5.155 24.88,5.155 24.85,5.185 ; 30.015,7.695 24.88,7.695 24.85,7.725 ; 30.015,12.775 24.85,12.775 ; 34.31,-37.475 34.31,-45.975 34.81,-45.975 ; 34.31,-34.225 34.31,-25.725 34.81,-25.725 ; 42,-45.875 42.5,-45.875 42.5,-37.375 ; 42,-25.625 42.5,-25.625 42.5,-34.125 ; 65.785,-20.27 70.84,-20.27 70.88,-20.23 70.94,-20.17 70.94,20.3 70.87,20.37 68.95,20.37 ; 65.785,-17.73 70.94,-17.73 ; 65.785,-15.19 70.94,-15.19 ; 65.785,-12.65 68.925,-12.65 ; 65.785,-10.11 70.94,-10.11 ; 65.785,-7.57 70.94,-7.57 ; 65.785,-5.03 70.94,-5.03 ; 65.785,0.05 70.94,0.05 ; 65.785,2.59 68.86,2.59 ; 65.785,5.13 68.9,5.13 ; 65.785,7.67 68.87,7.67 ; 65.785,10.21 70.94,10.21 ; 65.785,12.75 68.925,12.75 ; 65.785,15.29 70.94,15.29 ; 65.785,17.83 68.95,17.83 ; 66.42,20.37 68.95,20.37 ; 68.95,-15.14 68.95,-10.11 ; 68.95,-4.98 68.95,0.1 68.95,10.26 68.95,15.29 68.95,20.37 ; 24.85,-10.075 24.85,-7.545 ; 24.85,2.615 24.85,5.185 ; 24.85,5.185 24.85,7.725 ; 24.85,7.725 24.85,12.775 ; 42.5,-23 42.5,-19 53.3,-19 53.3,-23 42.5,-23
  lines w0.6: -17.5,60 -15.5,60 ; -17.5,64.4 -15.5,64.4 ; -16.5,59 -16.5,61
  text "R1" at 3.1,46.2 h1.5
  text "R16" at 20.77,46.2 h1.5
  text "R2" at 3.1,43.66 h1.5
  text "R15" at 20.77,43.66 h1.5
  text "B1" at -47.1,43.58 h1.5
  text "B16" at -29.43,43.58 h1.5
  text "R14" at 20.87,41.29 h1.5
  text "R3" at 3.1,41.12 h1.5
  text "B2" at -47.1,41.04 h1.5
  text "B15" at -29.43,41.04 h1.5
  text "R4" at 3.1,38.58 h1.5
  text "R13" at 20.77,38.58 h1.5
  text "B3" at -47.1,38.5 h1.5
  text "B14" at -29.43,38.5 h1.5
  text "R5" at 3.1,36.04 h1.5
  text "R12" at 20.77,36.04 h1.5
  text "B4" at -47.1,35.96 h1.5
  text "B13" at -29.43,35.96 h1.5
  text "G64" at -25.33,34.08 h1.5
  text "G56" at -7.66,34.08 h1.5
  text "R6" at 3.1,33.5 h1.5
  text "R11" at 20.77,33.5 h1.5
  text "B5" at -47.1,33.42 h1.5
  text "B12" at -29.43,33.42 h1.5
  text "G63" at -25.33,31.54 h1.5
  text "G55" at -7.66,31.54 h1.5
  text "R7" at 3.1,30.96 h1.5
  text "R10" at 20.77,30.96 h1.5
  text "B6" at -47.1,30.88 h1.5
  text "B11" at -29.43,30.88 h1.5
  text "G62" at -25.33,29 h1.5
  text "G54" at -7.66,29 h1.5
  text "R8" at 3.1,28.42 h1.5
  text "R9" at 20.77,28.42 h1.5
  text "B7" at -47.1,28.34 h1.5
  text "B10" at -29.43,28.34 h1.5
  text "G61" at -25.33,26.46 h1.5
  text "G53" at -7.66,26.46 h1.5
  text "B8" at -47.1,25.8 h1.5
  text "B9" at -29.43,25.8 h1.5
  text "G60" at -25.33,23.92 h1.5
  text "G52" at -7.66,23.92 h1.5
  text "RESET" at 59.55,23.25 h1.8
  text "3V3" at -52.4,22.4 h1.8 r270
  text "G59" at -25.33,21.38 h1.5
  text "G51" at -7.66,21.38 h1.5
  text "3V3" at -59.8,20.5 h1.8 r90
  text "G58" at -25.33,18.84 h1.5
  text "G50" at -7.66,18.84 h1.5
  text "B11" at 66.9,18.75 h1.8
  text "A8" at 27.65,18.725 h1.8
  text "B17" at -47.1,17.81 h1.5
  text "B32" at -29.43,17.81 h1.5
  text "I2C1" at 70.4,16.75 h1.3 r90
  text "G57" at -25.33,16.3 h1.5
  text "G49" at -7.66,16.3 h1.5
  text "A9" at 27.65,16.125 h1.8
  text "B10" at 66.9,16 h1.8
  text "B18" at -47.1,15.27 h1.5
  text "B31" at -29.43,15.27 h1.5
  text "A10" at 27.05,13.525 h1.8
  text "B1" at 66.9,13.46 h1.8
  text "USART1" at 26.25,13.125 h1.3 r90
  text "B19" at -47.1,12.73 h1.5
  text "B30" at -29.43,12.73 h1.5
  text "ADC12" at 70.4,11 h1.3 r90
  text "A11" at 27.05,10.985 h1.8
  text "B0" at 66.9,10.92 h1.8
  text "B20" at -47.1,10.19 h1.5
  text "B29" at -29.43,10.19 h1.5
  text "A12" at 27.05,8.445 h1.8
  text "R17" at 3.075,8.41 h1.5
  text "R32" at 20.745,8.41 h1.5
  text "A7" at 66.9,8.38 h1.8
  text "G41" at -25.36,8.31 h1.5
  text "G40" at -7.66,8.31 h1.5
  text "B21" at -47.1,7.65 h1.5
  text "B28" at -29.43,7.65 h1.5
  text "JTDI" at 26.65,5.925 h1.8
  text "R18" at 3.075,5.87 h1.5
  text "R31" at 20.745,5.87 h1.5
  text "A6" at 66.9,5.84 h1.8
  text "G42" at -25.36,5.77 h1.5
  text "G39" at -7.66,5.77 h1.5
  text "B22" at -47.1,5.11 h1.5
  text "B27" at -29.43,5.11 h1.5
  text "SPI1" at 70.4,3.75 h1.3 r90
  text "R19" at 3.075,3.33 h1.5
  text "R30" at 20.745,3.33 h1.5
  text "JTDO" at 26.25,3.325 h1.8
  text "A5" at 66.9,3.3 h1.8
  text "G43" at -25.36,3.23 h1.5
  text "G38" at -7.66,3.23 h1.5
  text "B23" at -47.1,2.57 h1.5
  text "B26" at -29.43,2.57 h1.5
  text "JNTRST" at 25.21,0.925 h1.6
  text "R20" at 3.075,0.79 h1.5
  text "R29" at 20.745,0.79 h1.5
  text "A4" at 66.9,0.76 h1.8
  text "G44" at -25.36,0.69 h1.5
  text "G37" at -7.66,0.69 h1.5
  text "B24" at -47.1,0.03 h1.5
  text "B25" at -29.43,0.03 h1.5
  text "B5" at 27.65,-1.595 h1.8
  text "R21" at 3.075,-1.75 h1.5
  text "R28" at 20.745,-1.75 h1.5
  text "A3" at 66.9,-1.78 h1.8
  text "G45" at -25.36,-1.85 h1.5
  text "G36" at -7.66,-1.85 h1.5
  text "B6" at 27.65,-4.135 h1.8
  text "R22" at 3.075,-4.29 h1.5
  text "R27" at 20.745,-4.29 h1.5
  text "A2" at 66.9,-4.32 h1.8
  text "G46" at -25.36,-4.39 h1.5
  text "G35" at -7.66,-4.39 h1.5
  text "USART2" at 70.3,-4.73 h1.3 r90
  text "I2C1" at 26.25,-6.075 h1.3 r90
  text "B7" at 27.65,-6.675 h1.8
  text "R23" at 3.075,-6.83 h1.5
  text "R26" at 20.745,-6.83 h1.5
  text "A1" at 66.9,-6.86 h1.8
  text "G47" at -25.36,-6.93 h1.5
  text "G34" at -7.66,-6.93 h1.5
  text "B33" at -47.1,-7.96 h1.5
  text "B48" at -29.43,-7.96 h1.5
  text "B8" at 27.65,-9.215 h1.8
  text "R24" at 3.075,-9.37 h1.5
  text "R25" at 20.745,-9.37 h1.5
  text "A0" at 66.9,-9.4 h1.8
  text "G48" at -25.36,-9.47 h1.5
  text "G33" at -7.66,-9.47 h1.5
  text "B34" at -47.1,-10.5 h1.5
  text "B47" at -29.43,-10.5 h1.5
  text "B9" at 27.65,-11.755 h1.8
  text "C15" at 66.9,-11.94 h1.8
  text "B35" at -47.1,-13.04 h1.5
  text "B46" at -29.43,-13.04 h1.5
  text "5V" at 27.65,-14.295 h1.8
  text "OSC32" at 70.4,-14.4 h1.3 r90
  text "C14" at 66.9,-14.48 h1.8
  text "B36" at -47.1,-15.58 h1.5
  text "B45" at -29.43,-15.58 h1.5
  text "C13" at 66.9,-17.02 h1.8
  text "G25" at -25.26,-17.39 h1.5
  text "G24" at -7.66,-17.39 h1.5
  text "R33" at 3.07,-17.41 h1.5
  text "R48" at 20.74,-17.41 h1.5
  text "B37" at -47.1,-18.12 h1.5
  text "B44" at -29.43,-18.12 h1.5
  text "VBAT" at 66.9,-19.56 h1.8
  text "G26" at -25.26,-19.93 h1.5
  text "G23" at -7.66,-19.93 h1.5
  text "R34" at 3.07,-19.95 h1.5
  text "R47" at 20.74,-19.95 h1.5
  text "B38" at -47.1,-20.66 h1.5
  text "B43" at -29.43,-20.66 h1.5
  text "3V3" at -52.4,-21.1 h1.8 r270
  text "SWD" at 46.7,-21.6 h2
  text "G27" at -25.26,-22.47 h1.5
  text "G22" at -7.66,-22.47 h1.5
  text "R35" at 3.07,-22.49 h1.5
  text "R46" at 20.74,-22.49 h1.5
  text "3V3" at -59.8,-23 h1.8 r90
  text "B39" at -47.1,-23.2 h1.5
  text "B42" at -29.43,-23.2 h1.5
  text "G28" at -25.26,-25.01 h1.5
  text "G21" at -7.66,-25.01 h1.5
  text "R36" at 3.07,-25.03 h1.5
  text "R45" at 20.74,-25.03 h1.5
  text "B40" at -47.1,-25.74 h1.5
  text "B41" at -29.43,-25.74 h1.5
  text "G29" at -25.26,-27.55 h1.5
  text "G20" at -7.66,-27.55 h1.5
  text "R37" at 3.07,-27.57 h1.5
  text "R44" at 20.74,-27.57 h1.5
  text "G30" at -25.26,-30.09 h1.5
  text "G19" at -7.66,-30.09 h1.5
  text "R38" at 3.07,-30.11 h1.5
  text "R43" at 20.74,-30.11 h1.5
  text "G31" at -25.26,-32.63 h1.5
  text "G18" at -7.66,-32.63 h1.5
  text "R39" at 3.07,-32.65 h1.5
  text "R42" at 20.74,-32.65 h1.5
  text "B49" at -47.1,-33.73 h1.5
  text "B64" at -29.43,-33.73 h1.5
  text "G32" at -25.26,-35.17 h1.5
  text "G17" at -7.66,-35.17 h1.5
  text "R40" at 3.07,-35.19 h1.5
  text "R41" at 20.74,-35.19 h1.5
  text "B50" at -47.1,-36.27 h1.5
  text "B63" at -29.43,-36.27 h1.5
  text "3V3" at 42.9,-36.7 h1.8 r90
  text "GND" at 34.8,-36.9 h1.8 r90
  text "B51" at -47.1,-38.81 h1.5
  text "B62" at -29.43,-38.81 h1.5
  text "B52" at -47.1,-41.35 h1.5
  text "B61" at -29.43,-41.35 h1.5
  text "G9" at -25.08,-43.2 h1.5
  text "R49" at 3,-43.2 h1.5
  text "R64" at 20.805,-43.19 h1.5
  text "G8" at -7.13,-43.21 h1.5
  text "B53" at -47.1,-43.89 h1.5
  text "B60" at -29.43,-43.89 h1.5
  text "G10" at -25.08,-45.74 h1.5
  text "R63" at 20.805,-45.73 h1.5
  text "G7" at -7.13,-45.75 h1.5
  text "R50" at 3,-45.8 h1.5
  text "B54" at -47.1,-46.43 h1.5
  text "B59" at -29.43,-46.43 h1.5
  text "G11" at -25.08,-48.28 h1.5
  text "R51" at 3.135,-48.27 h1.5
  text "R62" at 20.805,-48.27 h1.5
  text "G6" at -7.13,-48.29 h1.5
  text "B55" at -47.1,-48.97 h1.5
  text "B58" at -29.43,-48.97 h1.5
  text "G12" at -25.08,-50.82 h1.5
  text "R52" at 3.135,-50.81 h1.5
  text "R61" at 20.805,-50.81 h1.5
  text "G5" at -7.13,-50.83 h1.5
  text "B56" at -47.1,-51.51 h1.5
  text "B57" at -29.43,-51.51 h1.5
  text "G13" at -25.08,-53.36 h1.5
  text "R53" at 3.135,-53.35 h1.5
  text "R60" at 20.805,-53.35 h1.5
  text "G4" at -7.13,-53.37 h1.5
  text "G14" at -25.08,-55.9 h1.5
  text "R54" at 3.135,-55.89 h1.5
  text "R59" at 20.805,-55.89 h1.5
  text "G3" at -7.13,-55.91 h1.5
  text "G15" at -25.08,-58.44 h1.5
  text "R55" at 3.135,-58.43 h1.5
  text "R58" at 20.805,-58.43 h1.5
  text "G2" at -7.13,-58.45 h1.5
  text "G16" at -25.08,-60.98 h1.5
  text "R56" at 3.135,-60.97 h1.5
  text "R57" at 20.805,-60.97 h1.5
  text "G1" at -7.13,-60.99 h1.5
  text "Chudakov Maksim / fontes35@mail.ru / 17.01.2021" at -4.1,-72.6 h3